# Altium PCB PowerBoard.PcbDoc
Units mm, origin at the board's own origin, x right, y up, seen from the top; angles counter-clockwise.
Board outline 400 x 83.98 mm, 4 copper layers (Top Layer, Signal Layer 1, Signal Layer 2, Bottom Layer), stack 1.55 mm thick; 1 components, 119 nets, 9 pads, 0 vias.
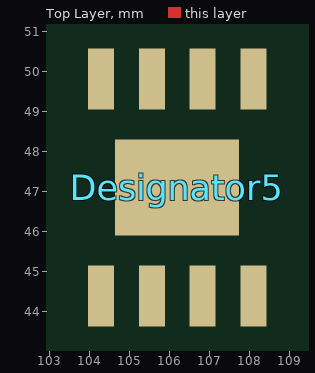
[diagram p0: Top Layer view]
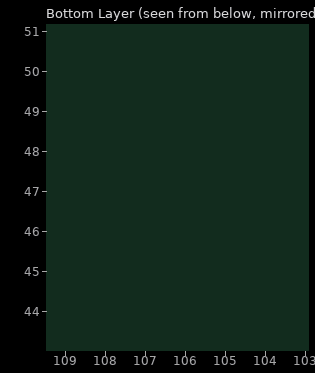
[diagram p1: Bottom Layer view, seen from below]

## Layer stack, top to bottom
Top Solder: solder mask 0.025, Solder Resist, Dk 3.5
Top Layer: signal copper 0.018
Dielectric 2: core 0.254, Dk 4.2
Signal Layer 1: signal copper 0.036
Dielectric 4: core 0.934, Dk 4.2
Signal Layer 2: signal copper 0.036
Dielectric 3: core 0.254, Dk 4.2
Bottom Layer: signal copper 0.018
Bottom Solder: solder mask 0.025, Solder Resist, Dk 3.5

## Board outline
27,0 25,2 25,4.7 21,4.7 cw(c21,5.7) 20,5.7 20,13 1,13 cw(c1,14) 0,14 0,79.679 cw(c2,79.679) 2,81.679 37.5,81.679 37.5,82.979 cw(c38.5,82.979) 38.5,83.979 61.5,83.979 cw(c61.5,82.979) 62.5,82.979 62.5,81.679 187.5,81.679 187.5,82.979 cw(c188.5,82.979) 188.5,83.979 211.5,83.979 cw(c211.5,82.979) 212.5,82.979 212.5,81.679 337.5,81.679 337.5,82.979 cw(c338.5,82.979) 338.5,83.979 361.5,83.979 cw(c361.5,82.979) 362.5,82.979 362.5,81.679 398,81.679 cw(c398,79.679) 400,79.679 400,14 cw(c399,14) 399,13 380,13 380,5.7 cw(c379,5.7) 379,4.7 375,4.7 375,2 373,0 347,0 345,2 345,4.7 341,4.7 cw(c341,5.7) 340,5.7 340,13 300,13 300,5.7 cw(c299,5.7) 299,4.7 295,4.7 295,2 293,0 267,0 265,2 265,4.7 261,4.7 cw(c261,5.7) 260,5.7 260,13 220,13 220,5.7 cw(c219,5.7) 219,4.7 215,4.7 215,2 213,0 187,0 185,2 185,4.7 181,4.7 cw(c181,5.7) 180,5.7 180,13 140,13 140,5.7 cw(c139,5.7) 139,4.7 135,4.7 135,2 133,0 107,0 105,2 105,4.7 101,4.7 cw(c101,5.7) 100,5.7 100,21.98 60,21.98 60,5.7 cw(c59,5.7) 59,4.7 55,4.7 55,2 53,0

## Design rules (kind name [scope] priority, off if disabled: settings)
AssemblyTestPointUsage AssemblyTestPointUsage_1 [All] p2:
AssemblyTestpoint AssemblyTestpoint_1 [All] p1: testpointundercomponent=TRUE minsize=1.016 maxsize=2.54 preferedsize=1.524 minholesize=0 maxholesize=1.016 preferedholesize=0.813 testpointgrid=0.025 usegrid=TRUE gridtolerance=0 allowsidetop=TRUE allowsidebottom=TRUE
Clearance Clearance_1 [All] p1: gap=0.5 ignorepadtopadclearanceinfootprint=FALSE except(0: Arc-Hole Track-Hole SMDPad-Hole THPad-Hole Via-Hole Fill-Hole Poly-Hole Region-Hole Text-Hole; 0.2: Arc-Arc Arc-Track Arc-SMDPad Arc-THPad Arc-Via Track-Track Track-SMDPad Track-THPad Track-Via SMDPad-SMDPad SMDPad-THPad SMDPad-Via THPad-THPad THPad-Via Via-Via)
ComponentClearance ComponentClearance_1 [All] p1: gap=0.2 collisioncheckmode=3 verticalgap=0.2 showdistances=TRUE
DiffPairsRouting DiffPairsRouting_1 [All] p1: maxlimit=0.254 minlimit=0.254 mostfreqgap=0.254 toplayer_minwidth=0.381 toplayer_maxwidth=0.381 toplayer_prefwidth=0.381 midlayer1_minwidth=0.381 midlayer1_maxwidth=0.381 midlayer1_prefwidth=0.381 midlayer2_minwidth=0.381 midlayer2_maxwidth=0.381 midlayer2_prefwidth=0.381 bottomlayer_minwidth=0.381 bottomlayer_maxwidth=0.381 bottomlayer_prefwidth=0.381 maxuncoupledlength=12.7
FabricationTestPointUsage FabricationTestPointUsage_1 [All] p1: valid=0 allowmultiple=FALSE
FabricationTestpoint FabricationTestpoint_1 [All] p1: side=3 testpointundercomponent=TRUE minsize=1.016 maxsize=2.54 preferedsize=1.524 minholesize=0 maxholesize=1.016 preferedholesize=0.813 testpointgrid=0.025 allowsidetop=TRUE allowsidebottom=TRUE usegrid=TRUE gridtolerance=0
FanoutControl Fanout_BGA_1 [IsBGA] p1: bgadir=Out bgaviamode=Centered fanoutstyle=Auto fanoutdirection=Alternating viagrid=0.025 // Fanout_BGA (Default Rule)
FanoutControl Fanout_LCC_1 [IsLCC] p2: bgadir=Out bgaviamode=Centered fanoutstyle=Auto fanoutdirection=Alternating viagrid=0.025 // Fanout_LCC (Default Rule)
FanoutControl Fanout_SOIC_1 [IsSOIC] p3: bgadir=Out bgaviamode=Centered fanoutstyle=Auto fanoutdirection=Alternating viagrid=0.025 // Fanout_SOIC (Default Rule)
FanoutControl Fanout_Small_1 [(CompPinCount < 5)] p4: bgadir=Out bgaviamode=Centered fanoutstyle=Auto fanoutdirection=OutThenIn viagrid=0.025 // Fanout_Small (Default Rule)
FanoutControl Fanout_Default_1 [All] p5: bgadir=Out bgaviamode=Centered fanoutstyle=Auto fanoutdirection=Alternating viagrid=0.025 // Fanout_Default (Default Rule)
Height Height_1 [All] p1: minheight=0 maxheight=25.4 prefheight=12.7
HoleSize HoleSize_1 [All] p1: absolutevalues=TRUE maxlimit=5 minlimit=0.3 maxpercent=80.000 minpercent=20.000
HoleToHoleClearance HoleToHoleClearance_1 [All] p1: gap=0.254 allowstackedmicrovias=TRUE
LayerPairs LayerPairs_1 [All] p1: enforce=TRUE
MinimumSolderMaskSliver MinimumSolderMaskSliver_1 [All] p1: minsoldermaskwidth=0.1
NetAntennae NetAntennae_1 [InNetClass('VIN')] p1: netantennaetolerance=0
PasteMaskExpansion PasteMaskExpansion_1 [All] p1: expansion=0
PlaneClearance PlaneClearance_1 [All] p1: clearance=0.508
PlaneConnect PlaneConnect_1 [All] p1: planeconnectstyle=Relief reliefexpansion=0.508 reliefentries=4 reliefconductorwidth=0.254 reliefairgap=0.254
PolygonConnect PolygonConnect_1 [All] p1: connectstyle=Direct reliefconductorwidth=0.254 reliefentries=4 polygonreliefangle="90 Angle" airgapwidth=0.254
RoutingCorners RoutingCorners_1 [All] p1: cornerstyle=45-Degree minsetback=2.54 maxsetback=2.54
RoutingLayers RoutingLayers_1 [All] p1: top layer_v5=TRUE mid layer 1_v5=TRUE mid layer 2_v5=TRUE bottom layer_v5=TRUE
RoutingPriority RoutingPriority_1 [All] p1: routingpriority=0
RoutingTopology RoutingTopology_1 [All] p1: topology=Shortest
RoutingVias RoutingVias_1 [All] p1: holewidth=0.4 width=0.8 viastyle="Through Hole" minholewidth=0.3 minwidth=0.6 maxholewidth=5 maxwidth=10
ShortCircuit ShortCircuit_1 [All] p1: allowed=FALSE
SilkToBoardRegionClearance SilkToBoardRegionClearance_1 [All] p2:
SilkToSilkClearance SilkToSilkClearance_1 [All] p1: silktosilkclearance=0
SilkToSolderMaskClearance SilkToSolderMaskClearance_1 [IsPad] p1: minsilkscreentomaskgap=0 clearancetoexposedcopper=TRUE
SolderMaskExpansion SolderMaskExpansion_1 [All] p1: expansion=0.102
UnRoutedNet UnRoutedNet_1 [All] p1:
UnpouredPolygon UnpouredPolygon_1 [All] p1:
Width Width_1 [All] p1: maxlimit=3.048 minlimit=0.2 preferedwidth=0.254
2 further rules are at their usual default settings.

## Components (designator, comment, footprint, x,y, rotation, side; value= is the part's Value field where it differs from the comment)
Designator5 "Comment" SOIC127P600X170-9N 106.2,47.1 r90 top

## Footprints (in the part's own frame and the unit in brackets; to place one, negate y for a bottom-side part, rotate by r counter-clockwise, add the part's x,y. Pads: shape width x height; smd on the part's side, far side on the other; paste and mask are expansions set on the pad)
SOIC127P600X170-9N [mm]
  rect 1.525x0.65 smd: 1(-2.712,1.905) 2(-2.712,0.635) 3(-2.712,-0.635) 4(-2.712,-1.905) 5(2.712,-1.905) 6(2.712,-0.635) 7(2.712,0.635) 8(2.712,1.905)
  rect 2.4x3.1 smd: 9(0,0)
  body extent -3,-2.45 3,2.45, height 1.57

## Nets (pads, with @x,y where several pads share a name; then routed paths per layer and width w, separated by ;. In a path a pad name is that pad's centre, name@x,y a point inside that pad or via, vN(x,y) a via of type N, cw(c..) or ccw(c..) an arc to the next point about the centre after c; other vN are vias at no path point)
+3V3: 
+5V8: 
+5V8_STANDBY: 
+12: 
CAN_H: 
CAN_L: 
DISPLAY_PWR_CONTROL: 
GND: 
LED_DATA: 
LED_EMERGENCY: 
LED_FAULT: 
LED_OVERRIDE: 
LED_POWER: 
LED_STANDBY: 
LED_STATUS: 
MASTER_RX: 
NetC28_2: 
NetC30_1: 
NetC31_1: 
NetC31_2: 
NetC32_1: 
NetC35_1: 
NetC35_2: 
NetC36_2: 
NetC37_1: 
NetC38_1: 
NetC39_2: 
NetC41_1: 
NetC42_1: 
NetC42_2: 
NetC43_1: 
NetC46_1: 
NetC46_2: 
NetC47_2: 
NetC48_1: 
NetC49_1: 
NetC53_2: 
NetC54_2: 
NetCONN1_4: 
NetCONN1_5: 
NetCONN1_7: 
NetCONN1_8: 
NetCONN1_9: 
NetCONN1_14: 
NetCONN1_19: 
NetCONN1_20: 
NetCONN1_21: 
NetCONN1_31: 
NetCONN2_17: 
NetCONN3_43: 
NetCONN4_39: 
NetCONN4_43: 
NetCONN5_40: 
NetCONN5_43: 
NetCONN6_39: 
NetCONN6_40: 
NetCONN6_43: 
NetCONN7_41: 
NetCONN7_43: 
NetCONN8_39: 
NetCONN8_41: 
NetCONN8_43: 
NetCONN9_38: 
NetCONN9_43: 
NetCONN10_38: 
NetCONN10_39: 
NetCONN10_43: 
NetCONN11_38: 
NetCONN11_40: 
NetCONN11_43: 
NetCONN12_38: 
NetCONN12_39: 
NetCONN12_40: 
NetCONN12_43: 
NetCONN13_38: 
NetCONN13_41: 
NetCONN13_43: 
NetCONN14_38: 
NetCONN14_39: 
NetCONN14_41: 
NetCONN14_43: 
NetCONN15_4: 
NetCONN16_4: 
NetCONN17_5: 
NetD2_1: 
NetD5_1: 
NetD8_C: 
NetQ2_1: 
NetQ3_1: 
NetQ4_1: 
NetQ5_1: 
NetQ7_1: 
NetQ9_1: 
NetQ10_1: 
NetQ11_1: 
NetQ12_1: 
NetR43_0: 
NetR44_1: 
NetR51_1: 
NetR52_1: 
NetR54_1: 
NetR59_0: 
NetR60_1: 
NetR61_1: 
NetR62_0: 
NetR65_1: 
NetR66_1: 
NetR68_1: 
NetR71_1: 
NetU11_2: 
NetU11_3: 
NTC_BACK: 
NTC_POWER: 
OVERRIDE_SW: 
POWER_SW: 
RX_FRONT_PANEL: 
TX_FRONT_PANEL: 
VIN: 
VIN_SWITCHED: 
pads on no net: Designator5.1 Designator5.2 Designator5.3 Designator5.4 Designator5.5 Designator5.6 Designator5.7 Designator5.8 Designator5.9